# Altium PCB Electrode-Front-End.PcbDoc
Units mil, origin at the board's own origin, x right, y up, seen from the top; angles counter-clockwise.
Board outline 1675 x 1075 mil, 4 copper layers (Top Layer, GND, POWER, Bottom Layer), stack 23.756 mil thick; 76 components, 48 nets, 223 pads, 208 vias.
Unrouted connection lines stored in the file: 52.
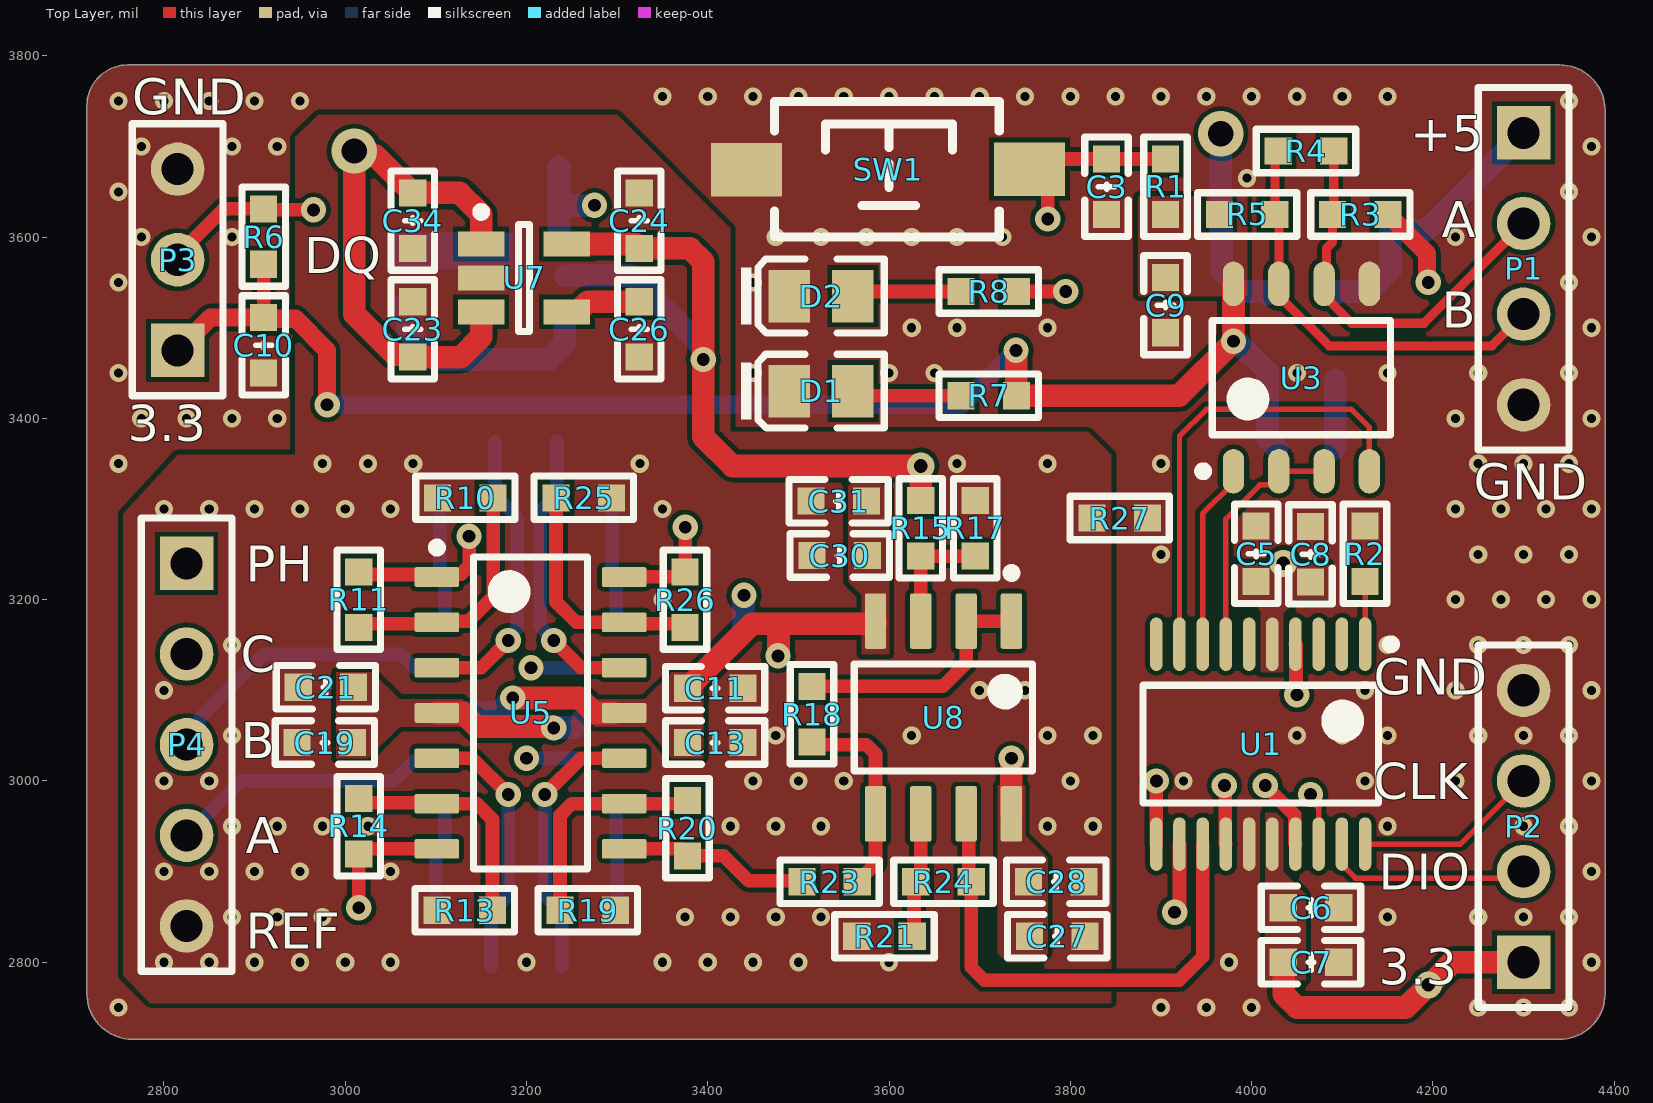
[diagram p0: Top Layer view]
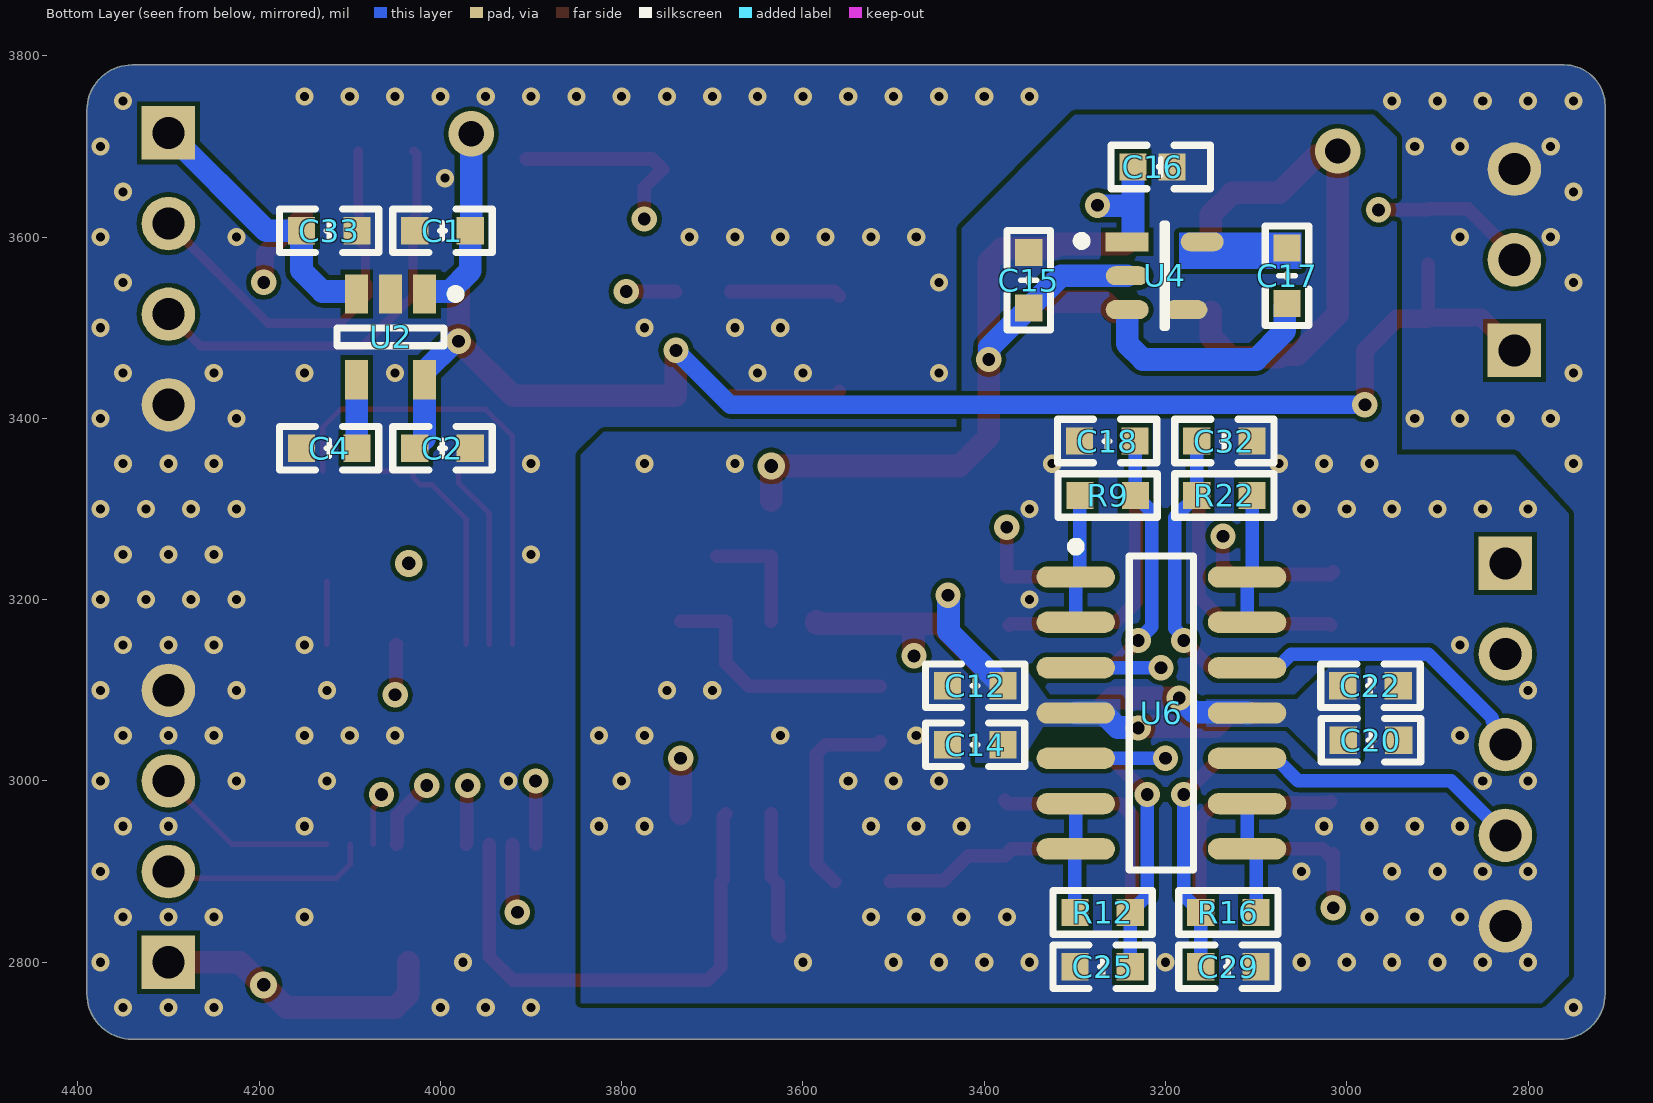
[diagram p1: Bottom Layer view, seen from below]
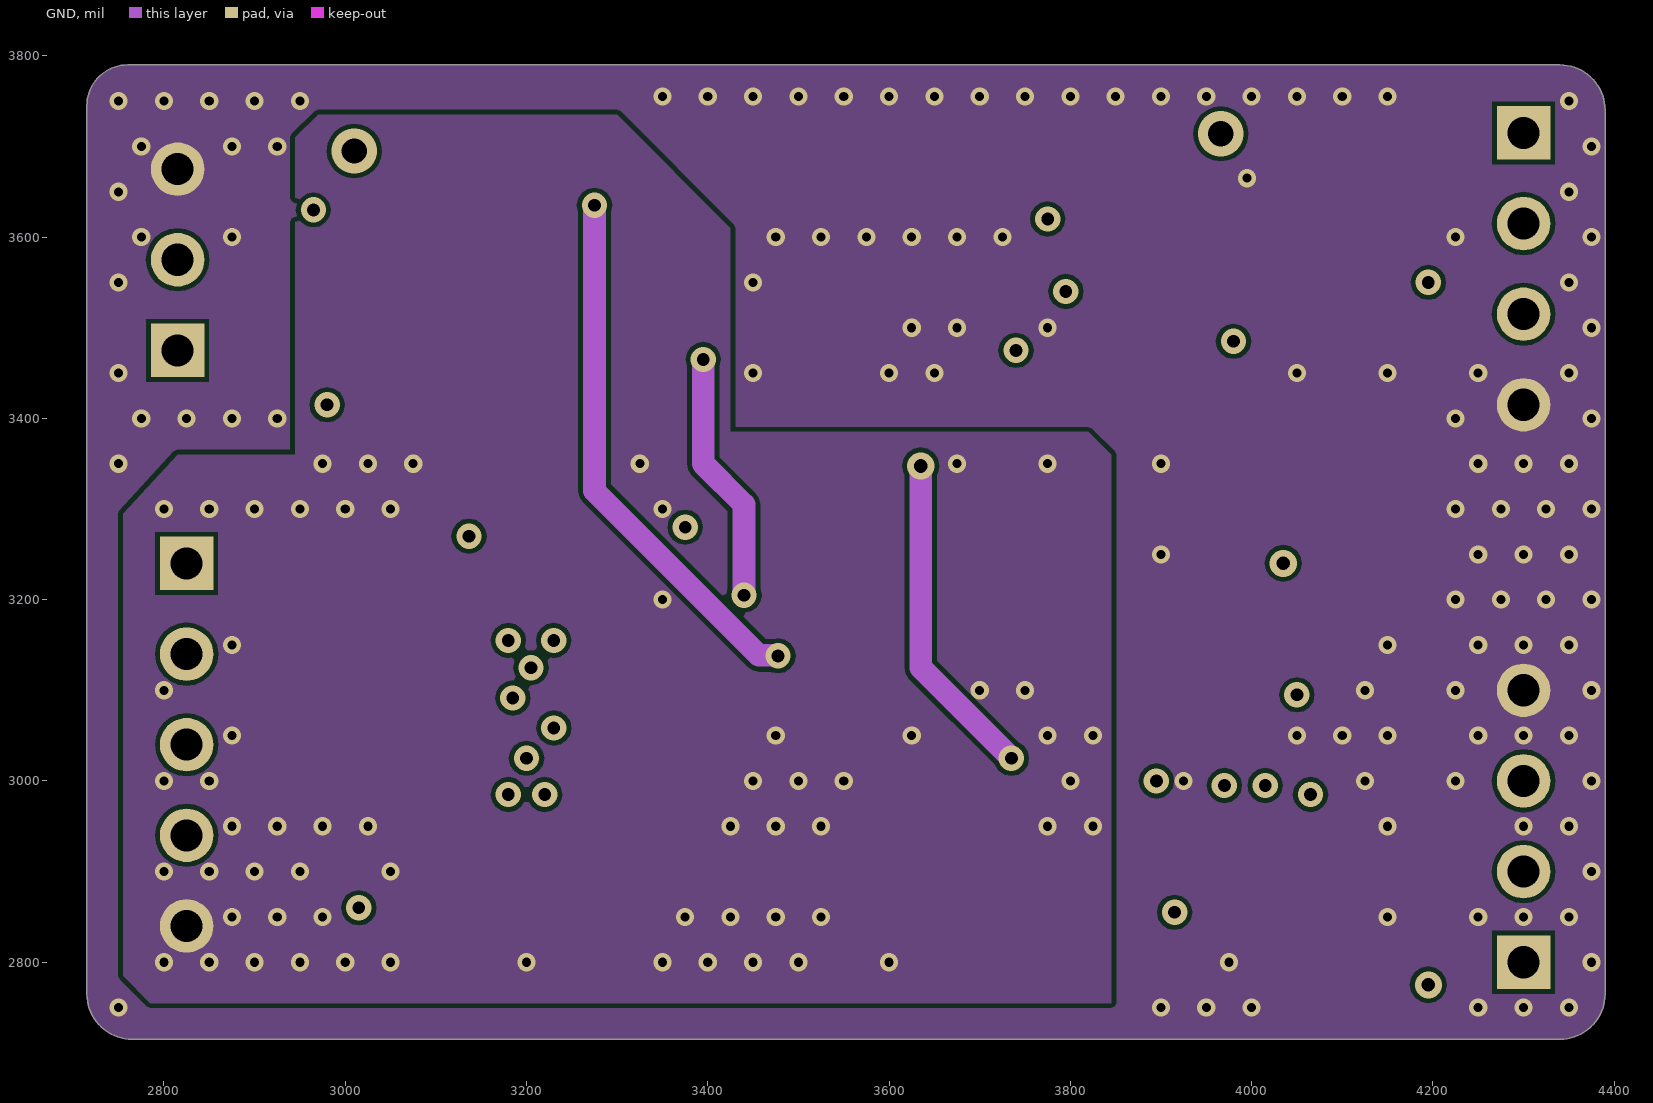
[diagram p2: GND]
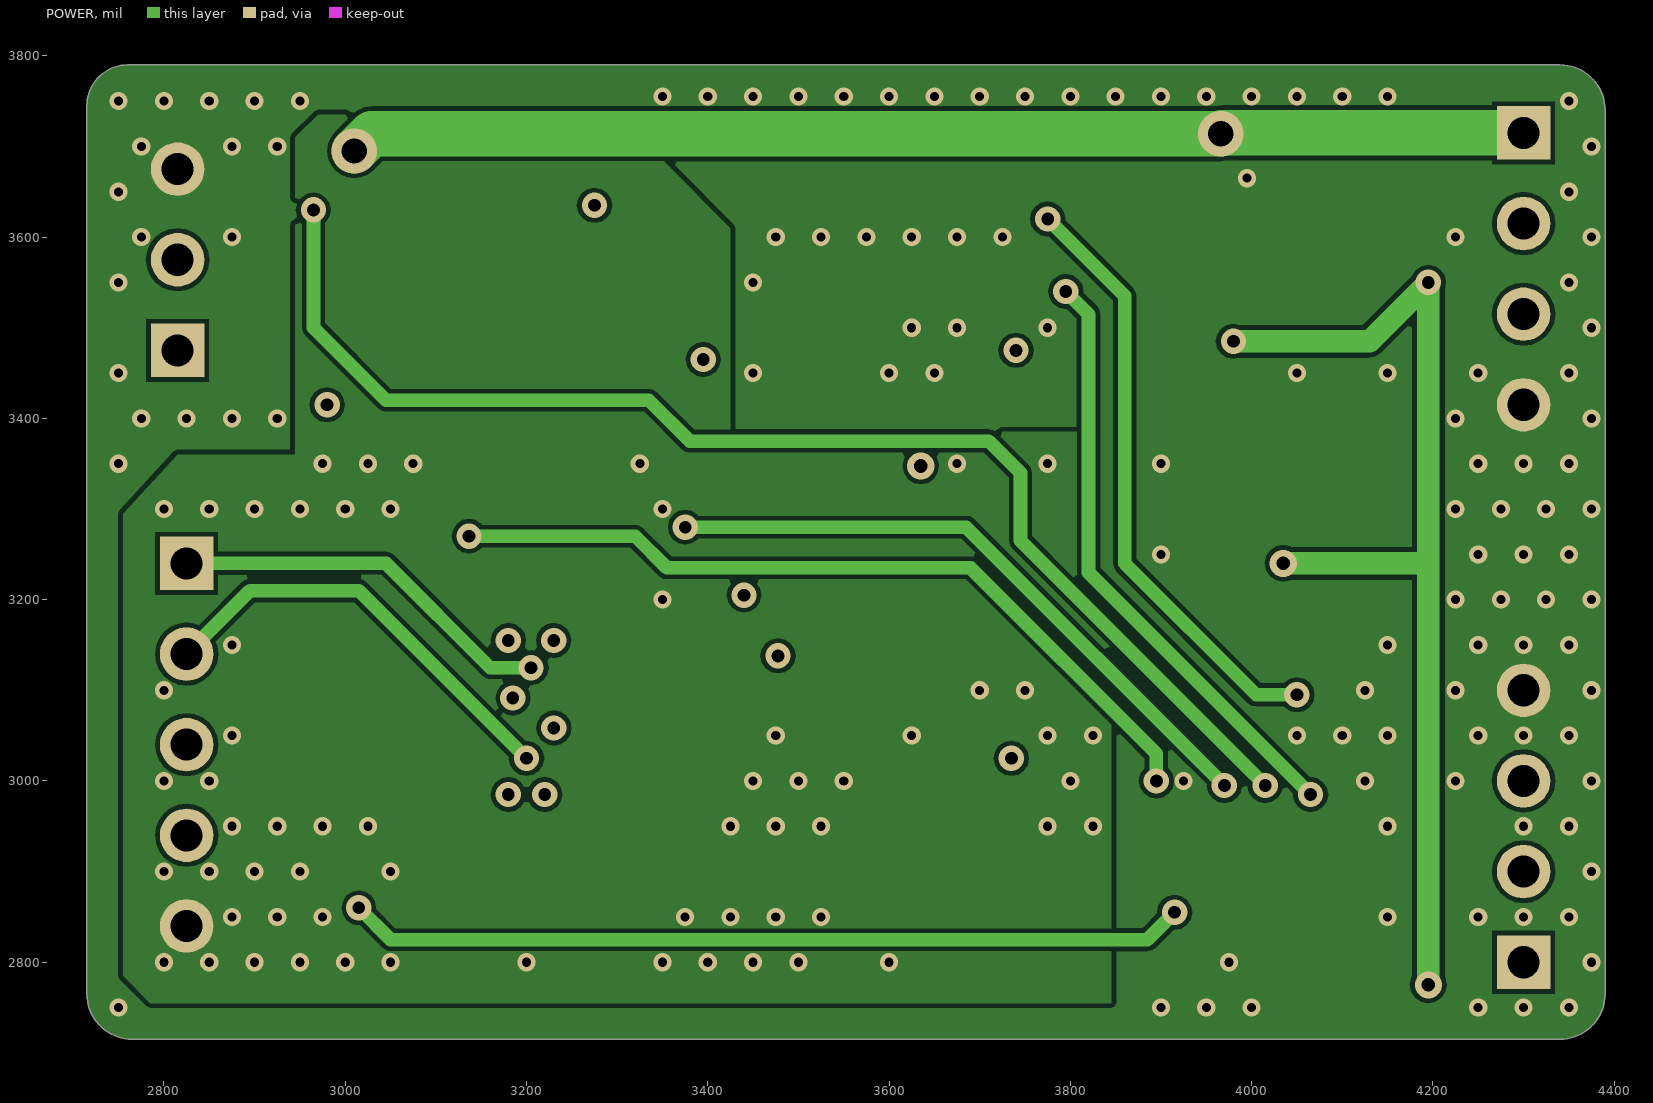
[diagram p3: POWER]
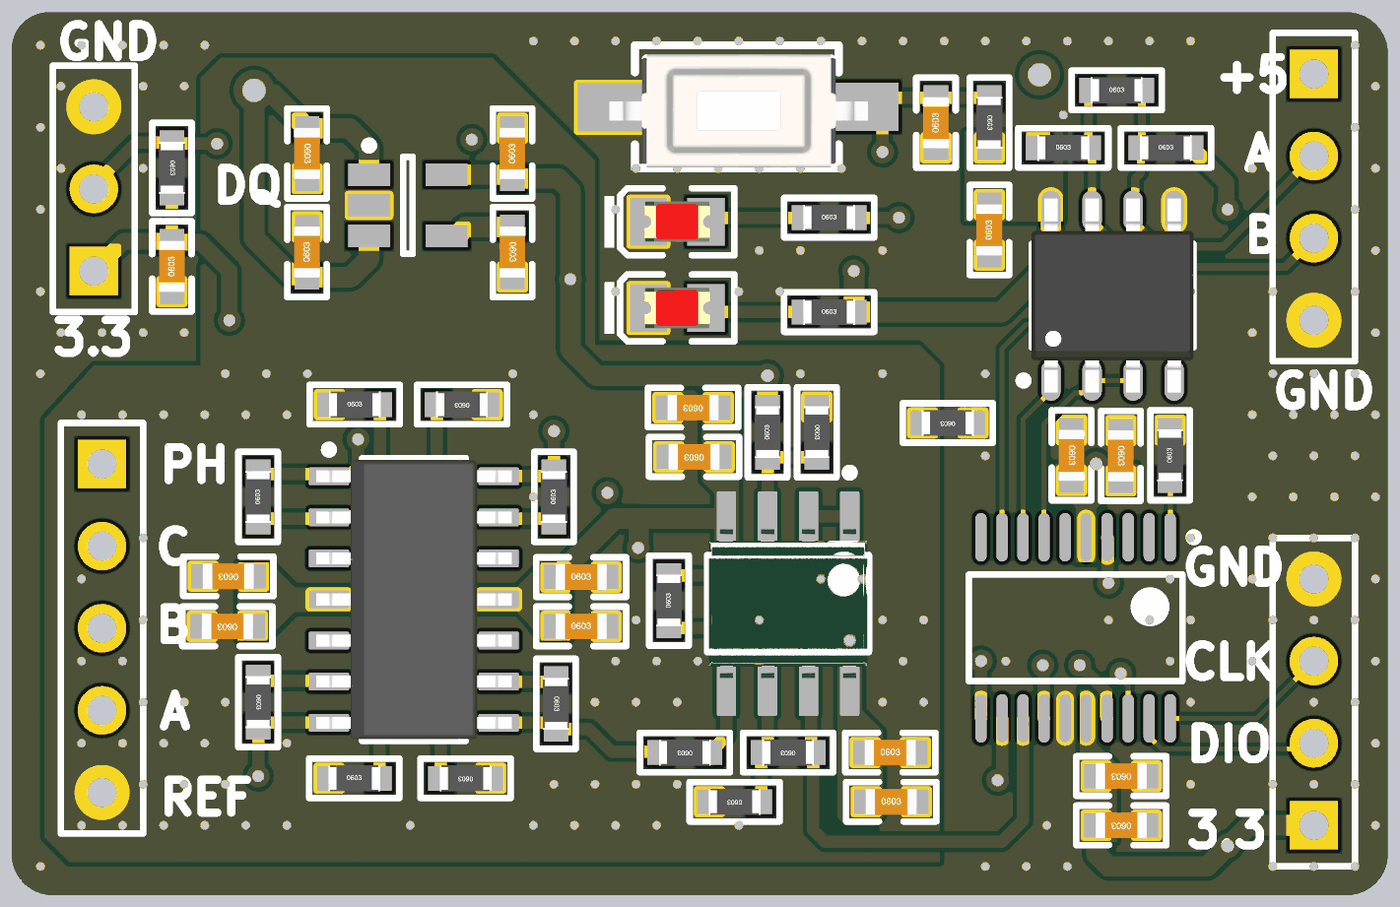
[diagram p4: 3D render of the assembled board from above, using the file's embedded part models]
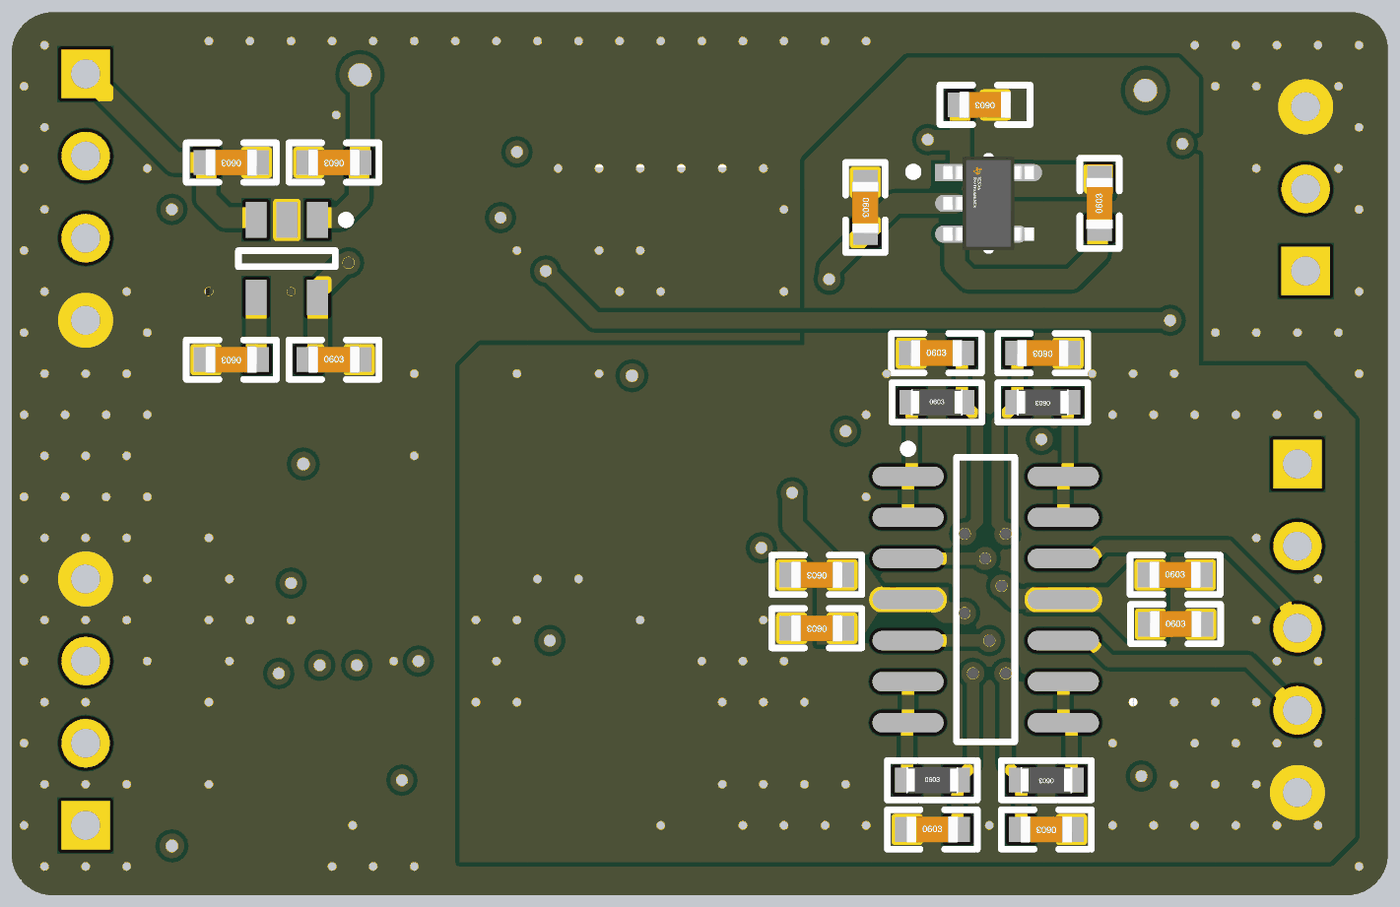
[diagram p5: 3D render of the assembled board from below, using the file's embedded part models]

## Layer stack, top to bottom
Top Solder: solder mask 0.4, Solder Resist, Dk 3.5
Top Layer: signal copper 1.4
Dielectric 2: prepreg 2.8, PP-006, Dk 4.1
GND: signal copper 1.378
Dielectric 1: dielectric 12.6, FR-4, Dk 4.8
POWER: signal copper 1.378
Dielectric 3: prepreg 2.8, PP-006, Dk 4.1
Bottom Layer: signal copper 1.4
Bottom Solder: solder mask 0.4, Solder Resist, Dk 3.5

## Board outline
2715,2765 2715,3745 cw(c2760,3745) 2760,3790 4340,3790 cw(c4340,3740) 4390,3740 4390,2765 cw(c4340,2765) 4340,2715 2765,2715 cw(c2765,2765)

## Design rules (kind name [scope] priority, off if disabled: settings)
Clearance [All] p1: gap=5 ignorepadtopadclearanceinfootprint=FALSE except(0: Arc-Hole Track-Hole SMDPad-Hole THPad-Hole Via-Hole Fill-Hole Poly-Hole Region-Hole Text-Hole)
ComponentClearance [All] p1: gap=0 collisioncheckmode=3 verticalgap=0 showdistances=FALSE
MinimumSolderMaskSliver [All] p1: minsoldermaskwidth=0
PlaneConnect [All] p1: planeconnectstyle=Direct reliefexpansion=20 reliefentries=4 reliefconductorwidth=10 reliefairgap=10
PolygonConnect [All] p1: connectstyle=Direct reliefconductorwidth=10 reliefentries=4 polygonreliefangle="90 Angle" airgapwidth=10
RoutingVias [All] p1: holewidth=28 width=50 viastyle="Through Hole" minholewidth=12 minwidth=24 maxholewidth=28 maxwidth=50
SilkToSilkClearance [All] p1: silktosilkclearance=0
SilkToSolderMaskClearance [IsPad] p1: minsilkscreentomaskgap=0 clearancetoexposedcopper=TRUE
SolderMaskExpansion [All] p1: expansion=4
Width Default [All] p1: maxlimit=50 minlimit=6 preferedwidth=10 minimp=50.000000 maximp=50.000000 favimp=50.000000
Width POWER [InNetClass('POWER')] p2: maxlimit=50 minlimit=20 preferedwidth=25
25 further rules are at their usual default settings.

## Classes and differential pairs
component class Sheet3: C11 C12 C13 C14 C15 C16 C17 C18 C19 C20 C21 C22 C23 C24 C25 C26 C27 C28 C29 C30 C31 C32 C34 R9 R10 R11 R12 R13 R14 R15 R16 R17 R18 R19 R20 R21 R22 R23 R24 R25 R26 U4 U5 U6 U7 U8
component class Sheet2: C1 C2 C3 C4 C5 C6 C7 C8 C9 C10 C33 D1 D2 P1 P2 P3 P4 R1 R2 R3 R4 R5 R6 R7 R8 R27 SW1 U1 U2 U3

## Components (designator, comment, footprint, x,y, rotation, side; value= is the part's Value field where it differs from the comment)
C1 "1uF" "C 0603_L"#1 3997.72,3607.1 r0 bottom
C2 "4.7uF" "C 0603_L"#1 3997.72,3367.1 r180 bottom
C3 "104" "C 0603_L"#1 3840,3655.59 r90 top
C4 "0.01uF" "C 0603_L"#1 4122.72,3367.1 r0 bottom
C5 "104" "C 0603_L"#1 4005,3250.59 r270 top
C6 "104" "C 0603_L"#1 4065.59,2860 r180 top
C7 "104" "C 0603_L"#1 4065.59,2800 r180 top
C8 "104" "C 0603_L"#1 4065,3250 r270 top
C9 "104" "C 0603_L"#1 3905,3525 r90 top
C10 "104" "C 0603_L"#1 2910,3480.59 r90 top
C11 "10uF" "C 0603_L"#1 3408.13,3102.32 r0 top
C12 "10uF" "C 0603_L"#1 3410,3105 r0 bottom
C13 "0.1uF" "C 0603_L"#1 3408.13,3042.32 r0 top
C14 "0.1uF" "C 0603_L"#1 3410,3040 r0 bottom
C15 "104" "C 0603_L"#1 3350.89,3552.4 r270 bottom
C16 "104" "C 0603_L"#2 3205.3,3677.4 r0 bottom
C17 "104" "C 0603_L"#1 3065.89,3557.4 r90 bottom
C18 "0.1uF" "C 0603_L"#1 3264.41,3375 r180 bottom
C19 "10uF" "C 0603_L"#1 2977.54,3042.32 r180 top
C20 "10uF" "C 0603_L"#1 2973.31,3045 r180 bottom
C21 "0.1uF" "C 0603_L"#1 2978.71,3103.32 r180 top
C22 "0.1uF" "C 0603_L"#1 2973.9,3105 r180 bottom
C23 "1uF" "C 0603_L"#1 3074.49,3498.19 r90 top
C24 "4.7uF" "C 0603_L"#1 3324.49,3618.19 r90 top
C25 "0.1uF" "C 0603_L"#1 3269.41,2795 r180 bottom
C26 "0.01uF" "C 0603_L"#1 3324.49,3498.19 r270 top
C27 "10uF" "C 0603_L"#1 3785.59,2828.7 r0 top
C28 "0.1uF" "C 0603_L"#1 3784.41,2888.7 r0 top
C29 "0.1uF" "C 0603_L"#1 3130.59,2795 r0 bottom
C30 "10uF" "C 0603_L"#1 3545.59,3248.7 r180 top
C31 "0.1uF" "C 0603_L"#1 3544.41,3308.7 r180 top
C32 "0.1uF" "C 0603_L"#1 3135,3375 r0 bottom
C33 "1uF" "C 0603_L"#1 4122.72,3607.1 r0 bottom
C34 "1uF" "C 0603_L"#1 3074.49,3618.19 r270 top
D1 "蓝灯 0805" 0805_LED_S1 3525.04,3430 r0 top
D2 "蓝灯 0805" 0805_LED_S1 3525.04,3535 r0 top
P1 "Header 4" HDR1X4 4300,3715 r270 top
P2 "Header 4" HDR1X4 4300,2800 r90 top
P3 "Header 3" HDR1X3 2815,3475 r90 top
P4 "Header 5" HDR1X5 2825,3240 r270 top
R1 "1K" "R 0603_L" 3905,3655.59 r270 top
R2 "1K" "R 0603_L" 4125,3250.59 r90 top
R3 "360" "R 0603_L" 4120,3625 r0 top
R4 "120" "R 0603_L" 4060,3695 r0 top
R5 "360" "R 0603_L" 3995,3625 r0 top
R6 "1K" "R 0603_L" 2910,3600.59 r270 top
R7 "360" "R 0603_L" 3710,3425 r0 top
R8 "360" "R 0603_L" 3710,3540 r0 top
R9 "100Ω" "R 0603_L" 3263.82,3315 r180 bottom
R10 "100Ω" "R 0603_L" 3132.54,3312.32 r0 top
R11 "100Ω" "R 0603_L" 3015,3200 r90 top
R12 "10KΩ" "R 0603_L" 3269.41,2855 r180 bottom
R13 "100Ω" "R 0603_L" 3131.94,2857.32 r0 top
R14 "100Ω" "R 0603_L" 3015,2950 r270 top
R15 "100Ω" "R 0603_L" 3635,3278.7 r90 top
R16 "10KΩ" "R 0603_L" 3130.59,2855 r0 bottom
R17 "100Ω" "R 0603_L" 3695,3278.7 r270 top
R18 "100Ω" "R 0603_L" 3515,3073.7 r90 top
R19 "100Ω" "R 0603_L" 3267.54,2857.32 r180 top
R20 "100Ω" "R 0603_L" 3377.54,2947.91 r270 top
R21 "100Ω" "R 0603_L" 3595,2828.7 r180 top
R22 "10KΩ" "R 0603_L" 3135,3315 r0 bottom
R23 "100Ω" "R 0603_L" 3534.41,2888.7 r180 top
R24 "100Ω" "R 0603_L" 3660,2888.7 r180 top
R25 "100Ω" "R 0603_L" 3263.13,3312.32 r180 top
R26 "100Ω" "R 0603_L" 3375,3200 r90 top
R27 "0" "R 0603_L" 3854.41,3290 r180 top
SW1 "3x6x5" "TSW SMD-3*6*2.5" 3600,3675 r0 top
U1 "STM32F030F4P6" STM-TSSOP20_L 4010,3040.59 r270 top
U2 "LP2992AIM5X-3.3" MF05A_N 4055,3490 r270 bottom
U3 "ST3485EBDR" STM-SO-8_C_L 4055,3445 r90 top locked
U4 "TPS60400DBVT" FP-DBV0005A-IPC_C 3200.89,3557.4 r180 bottom
U5 "TLC2274AIDR" D0014A_L 3204.49,3075 r0 top
U6 "AD8609ARZ-REEL7" ADI-R-14_N 3204.49,3075 r180 bottom
U7 "LP2992AIM5X-2.5" MF05A_M 3197.24,3555 r0 top
U8 "LMV358IDR" FP-D0008A-MFG 3660,3070 r270 top

## Footprints (in the part's own frame and the unit in brackets; to place one, negate y for a bottom-side part, rotate by r counter-clockwise, add the part's x,y. Pads: shape width x height; smd on the part's side, far side on the other; paste and mask are expansions set on the pad)
0805_LED_S1 [mm]
  rect 1.16x1.47 smd: A(0.89,0) K(-0.89,0)
  silkscreen extent -2.24,-1.04 1.77,1.03, body extent -1.01,-0.62 1.01,0.62, height 1.1
ADI-R-14_N [mm] "SOIC, 14-Leads, Body 8.65x3.9mm, Pitch 1.27mm, IPC Medium Density"
  oval 2.2x0.6 smd: 1(-2.4,3.81) 2(-2.4,2.54) 3(-2.4,1.27) 4(-2.4,0) 5(-2.4,-1.27) 6(-2.4,-2.54) 7(-2.4,-3.81) 8(2.4,-3.81) 9(2.4,-2.54) 10(2.4,-1.27) 11(2.4,0) 12(2.4,1.27) 13(2.4,2.54) 14(2.4,3.81)
  silkscreen extent -2.53,-4.4 0.9,4.78, body extent -2,-4.4 2,4.4, height 1.75
"C 0603_L"#1 [mil] "无极性贴片电容"
  rect 30x30 smd: 1(-30.59,0) 2(30.59,0)
  silkscreen extent -55,-24 55,24, body extent -31,-16 31,16, height 32
"C 0603_L"#2 [mil] "无极性贴片电容"
  rect 30x30 smd: 1(-12.59,0) 2(30.59,0)
  silkscreen extent -55,-24 55,24, body extent -31,-16 31,16, height 32
D0014A_L [mm] "SOIC, 14-Leads, Body 8.75x4mm, Pitch 1.27mm, IPC High Density"
  rrect18% 1.25x0.55 smd: 1(-2.625,3.81) 2(-2.625,2.54) 3(-2.625,1.27) 4(-2.625,0) 5(-2.625,-1.27) 6(-2.625,-2.54) 7(-2.625,-3.81) 8(2.625,-3.81) 9(2.625,-2.54) 10(2.625,-1.27) 11(2.625,0) 12(2.625,1.27) 13(2.625,2.54) 14(2.625,3.81)
  silkscreen extent -2.75,-4.38 1.6,4.76, body extent -3.02,-4.32 3.02,4.32, height 1.59
FP-D0008A-MFG [mm]
  rrect17% 1.55x0.6 smd paste+0 mask+0: 1(-2.7,1.905) 2(-2.7,0.635) 3(-2.7,-0.635) 4(-2.7,-1.905) 5(2.7,-1.905) 6(2.7,-0.635) 7(2.7,0.635) 8(2.7,1.905)
  silkscreen extent -4.17,-2.5 1.5,2.5, body extent -3.57,-2.75 3.57,2.75, height 0.25
FP-DBV0005A-IPC_C [mm]
  rect 1.205x0.532 smd paste+0 mask+0: 1(-1.05,0.95)
  rrect100% 1.205x0.532 smd paste+0 mask+0: 2(-1.05,0) 3(-1.05,-0.95) 4(0.593,-0.95) 5(1.05,0.95)
  silkscreen extent -2.45,-1.45 0.05,1.45, body extent -1.4,-1.45 1.4,1.45, height 1.45
HDR1X3 [mm] "Connector; Header; 3 Position"
  rect 1.5x1.5 hole 0.9: 1(0,0)
  round 1.5 hole 0.9: 2(2.54,0) 3(5.08,0)
  silkscreen extent -1.27,-1.27 6.35,1.27
HDR1X4 [mm] "Connector; Header; 4 Position"
  rect 1.5x1.5 hole 0.9: 1(0,0)
  round 1.5 hole 0.9: 2(2.54,0) 3(5.08,0) 4(7.62,0)
  silkscreen extent -1.27,-1.27 8.89,1.27
HDR1X5 [mm] "Connector; Header; 5 Position"
  rect 1.5x1.5 hole 0.9: 1(0,0)
  round 1.5 hole 0.9: 2(2.54,0) 3(5.08,0) 4(7.62,0) 5(10.16,0)
  silkscreen extent -1.27,-1.27 11.43,1.27
MF05A_M [mm] "SOT23, 5-Leads, Body 2.9x1.6mm, Pitch 0.95mm, Lead Span 2.8mm, IPC Low Density"
  rect 1.3x0.7 smd: 1(-1.2,0.95) 2(-1.2,0) 3(-1.2,-0.95) 4(1.2,-0.95) 5(1.2,0.95)
  silkscreen extent -1.32,-1.5 0.15,1.97, body extent -0.83,-1.49 0.83,1.5, height 1.19
MF05A_N [mm] "SOT23, 5-Leads, Body 2.9x1.6mm, Pitch 0.95mm, Lead Span 2.8mm, IPC Medium Density"
  rect 1.1x0.65 smd: 1(-1.2,0.95) 2(-1.2,0) 3(-1.2,-0.95) 4(1.2,-0.95) 5(1.2,0.95)
  silkscreen extent -1.32,-1.5 0.25,1.95, body extent -0.83,-1.49 0.83,1.5, height 1.19
"R 0603_L" [mil] "1/10W贴片电阻"
  rect 30x30 smd: 1(-30.59,0) 2(30.59,0)
  silkscreen extent -55,-24 55,24, body extent -31,-16 32,16, height 16
STM-SO-8_C_L [mm] "SOIC, 8-Leads, Body 5x4mm, Pitch 1.27mm, IPC High Density"
  oval 1.25x0.6 smd: 1(-2.625,1.905) 2(-2.625,0.635) 3(-2.625,-0.635) 4(-2.625,-1.905) 5(2.625,-1.905) 6(2.625,-0.635) 7(2.625,0.635) 8(2.625,1.905)
  silkscreen extent -2.75,-2.5 1.6,2.88, body extent -3,-2.5 3,2.5, height 1.75
STM-TSSOP20_L [mm] "SOP, 20-Leads, Body 6.6x4.5mm, Pitch 0.65mm, IPC High Density"
  oval 1.5x0.35 smd: 1(-2.8,2.925) 2(-2.8,2.275) 3(-2.8,1.625) 4(-2.8,0.975) 5(-2.8,0.325) 6(-2.8,-0.325) 7(-2.8,-0.975) 8(-2.8,-1.625) 9(-2.8,-2.275) 10(-2.8,-2.925) 11(2.8,-2.925) 12(2.8,-2.275) 13(2.8,-1.625) 14(2.8,-0.975) 15(2.8,-0.325) 16(2.8,0.325) 17(2.8,0.975) 18(2.8,1.625) 19(2.8,2.275) 20(2.8,2.925)
  silkscreen extent -2.92,-3.3 1.65,3.78, body extent -2.25,-3.3 2.25,3.3, height 1.2
"TSW SMD-3*6*2.5" [mm] "3*6*2.5mm"
  rect 2x1.5 smd: 1(-3.996,-0.02) 2(3.937,0)
  silkscreen extent -3.21,-1.9 3.09,1.9, body extent -4,-1.88 4,1.62, height 2.59

## Part data
C1 C2 C3 C4 C5 C6 C7 C8 C9 C10 C15 C16 C17 C23 C24 C26 C33 C34: library part C, "无极性贴片电容"
C11 C12 C19 C20 C27 C30: library part "0603 10uF (106) 10% 10V", "贴片电容", Package=0603, SuppliersPartNumber=C19702, ComponentLink1Description=供应商链接, ComponentLink1URL=http://www.szlcsc.com/product/details_20411.html, Supplier=LC
C13 C14 C18 C21 C22 C25 C28 C29 C31 C32: library part "0603 100nF (104) 10% 50V", "贴片电容", Package=0603, SuppliersPartNumber=C14663, ComponentLink1Description=供应商链接, ComponentLink1URL=http://www.szlcsc.com/product/details_15331.html, Supplier=LC
D1 D2: library part "0805 蓝灯", "发光二极管", Package=0805, SuppliersPartNumber=C2293, ComponentLink1Description=供应商链接, ComponentLink1URL=http://www.szlcsc.com/product/details_2666.html, Supplier=LC
P1 P2: "Header, 4-Pin", LatestRevisionDate=17-Jul-2002, LatestRevisionNote="Re-released for DXP Platform.", Publisher="Altium Limited"
P3: "Header, 3-Pin", LatestRevisionDate=17-Jul-2002, LatestRevisionNote="Re-released for DXP Platform.", Publisher="Altium Limited"
P4: "Header, 5-Pin", LatestRevisionDate=17-Jul-2002, LatestRevisionNote="Re-released for DXP Platform.", Publisher="Altium Limited"
R1 R2 R3 R4 R5 R6 R7 R8 R27: library part R, "贴片电阻"
R9 R10 R11 R12 R13 R14 R15 R16 R17 R18 R19 R20 R21 R22 R23 R24 R25 R26: library part "0603 100Ω (1000) 1%", "贴片电阻", Package=0603, SuppliersPartNumber=C22775, ComponentLink1Description=供应商链接, ComponentLink1URL=http://www.szlcsc.com/product/details_23502.html, Supplier=LC
SW1: library part "TSW 3x6", "3x6轻触开关", BOM名称=3x6轻触开关
U1: library part CMP-0304-00039-2, "ARM Cortex-M0 32-bit MCU, 16 KB Flash, 4 KB Internal RAM, 15 I/Os, 20-pin TSSOP, -40 to 85 degC, Tube", I/Os (High Current)=15, Operating Frequency(F) (Processor speed) (MHz)=48, Supply Voltage(Vcc) min (V)=2.4, ComponentLink1Description="Manufacturer URL", ComponentLink1URL=http://www.st.com/web/en/home.html, ComponentLink2Description=Datasheet, ComponentLink2URL=http://www.st.com/st-web-ui/static/active/en/resource/technical/document/datasheet/DM00088500.pdf, ComponentLink3Description="Package Specification", ComponentLink3URL=http://www.st.com/st-web-ui/static/active/en/resource/technical/document/datasheet/DM00065136.pdf, Core="ARM Cortex-M0", DatasheetVersion="Rev. 1", FLASH Size (Prog) (kB)=16, Internal RAM Size (kB)=4, Mounting Technology="Surface Mount", PackageDescription="20-Pin Thin Shrink Small Outline Package, 6.5 x 4.4 mm Body, 0.65 mm Pitch", PackageReference=TSSOP20, PackageVersion="Rev. 1, 11/2012", Packing=Tube, PartNumber=STM32F030F4P6
U2: library part CMP-0062-02134-2, "Micropower 250 mA Low-Noise Ultra Low-Dropout Regulator, 5-pin SOT-23", Manufacturer="National Semiconductor", PackageTopMarking=LFEA*XTT, PowerWise=N, ComponentLink1Description="LP2992 Datasheet", ComponentLink1URL=http://www.national.com/ds/LP/LP2992.pdf, ComponentLink2Description="LP2992 Web Page", ComponentLink2URL=http://www.national.com/pf/LP/LP2992.html, ComponentLink3Description="MF05A Package Page", ComponentLink3URL=http://www.national.com/packaging/folders/mf05a.html, CompType="LDO IC", DatasheetVersion=May-2005, PackageDescription="Molded SOT-23, .115 x .063 x .040 in Body, 5 Lead, .0375 in Pitch", PackageReference=MF05A, PackageVersion="revD, Aug-2008", PinCount=5, RevisionNote="Component URLs added", RoHS=N
U3: library part CMP-2000-07158-1, "15 KV ESD Protected, Up to 12 Mbps RS-485/RS-422 Transceiver, 3.3 V, -40 to 85 degC, 8-Pin SOIC (SO-8), RoHS, Tape and Reel", Dual Supply Voltage (Max)=NotRequiredV, Manufacturer=STMicroelectronics, Operating Temp Range=-40Cto85C, Operating Temperature Classification=Industrial, Package Description="8-Pin Small Outline Integrated Circuit, Body 4.9 x 3.9 mm, Pitch 1.27 mm", Package Reference=SO-8, Package Type=SOICN, Power Supply Requirement=Single, Single Supply Voltage (Max)=3.6V, Single Supply Voltage (Min)=3V, Single Supply Voltage (Typ)=3.3V, Supply Current=2.2mA, Data Rate=15kbps, Data Transmission Topology=Multidrop/Multipoint, Datasheet URL=http://www.produktinfo.conrad.com/datenblaetter/1100000-1199999/001185042-da-01-en-IC_TXRX_3_3V_RS485_ST3485EBDR_SOIC_8_STM.pdf, Datasheet Version="Rev. 6 , 12/2013", DELETED=Compliant, Dual Supply Voltage (Min)=NotRequiredV, Dual Supply Voltage (Typ)=NotRequiredV, Interface Circuit Standard 1=RS-422/RS-485, Manufacturer URL=http://www.st.com/, Mounting=SurfaceMount, Mounting Technology=SurfaceMount, Number of Receivers=1, Number of Transceivers=1, Number of Transmitters=1, Packaging=TapeandReel, Pin Count=8, Rad Hardened=No, Receiver Signal Type=Differential, Transmitter Signal Type=Differential
U4: library part CMP-0391-00017-3, "IC REG CHARG PUMP INV 60MA SOT23", Case/Package=SOT-23, Current Rating=60A, Frequency=250kHz, Max Input Voltage=5.25V, Max Operating Temperature=85°C, Max Output Current=60mA, Max Output Voltage=-5.25V, Min Input Voltage=1.8V, Min Operating Temperature=-40°C, Min Output Voltage=-1.6V, Operating Supply Current=125uA, Output Power=437mW, Package Quantity=1, Contact Plating=Gold, Height=1.15mm, Lead Free="Lead Free", Length=2.9mm, Logic Function=Inverting, Max Supply Voltage=5.25V, Min Supply Voltage=1.8V, Number of Outputs=1, Number of Pins=5, Output Current=60mA, Output Type=Adjustable, Output Voltage=-5.25V, Packaging="Tape and Reel", Quiescent Current=125uA, Radiation Hardening=No, REACH SVHC="No SVHC", Switching Frequency=250kHz, Synchronous Rectifier=No, Termination=SMD/SMT, Weight=0.000459oz, Width=1.6mm
U5: library part CMP-0272-01921-3, "Advanced LinCMOS(TM) Rail-to-Rail Quad Operational Amplifier, 4.4 to 16 V, -40 to 125 degC, 14-pin SOIC (D14), Green (RoHS & no Sb/Br)", Manufacturer="Texas Instruments", Rating=Catalog, Total Supply Voltage(Max)(+5V is 5, +/-5V is 10)=16, Total Supply Voltage(Min)(+5V is 5, +/-5V is 10)=4.4, CMRR(Min)(dB)=70, Code_JEDEC=MS-012, ComponentLink1Description="Manufacturer URL", ComponentLink1URL=http://www.ti.com/, ComponentLink2Description=Datasheet, ComponentLink2URL=http://www.ti.com/lit/ds/symlink/tlc2274a.pdf, ComponentLink3Description="Package Specification", ComponentLink3URL=http://www.ti.com/lit/ml/mpds177g/mpds177g.pdf, DatasheetVersion=SLOS190G, Eco-Plan="Green (RoHS & no Sb/Br)", GBW(Typ)(MHz)=2.18, IIB(Max)(pA)=60, Iq per channel(Max)(mA)=1.5, Mounting Technology="Surface Mount", Number of Channels=4, Offset Drift(Typ)(uV/C)=2, PackageDescription="14-Pin Plastic Small Outline, Body 8.65 x 3.9 mm, Pitch 1.27 mm", PackageReference=D0014A, PackageVersion="4040047-5/M, 06/2011", Packing="LARGE T&R", PartNumber=TLC2274AIDR, Slew Rate(Typ)(V/us)=3.6, Sub Family="Low Noise Amp (<=10nV/rtHz), Precision Amplifier", Vio (25C)(Max)(mV)=0.95
U6: library part CMP-0384-00468-2, "Quad Channel Single-Supply Operation Operational Amplifier, 400 KHz BW, 100 mV/us SR, Industrial, 14-pin SOIC (R-14), Reel", Amplifiers Per Package=4, Generic Part Number=AD8609, Input Bias Current=200fA, Input Offset Voltage=12uV, Manufacturer="Analog Devices", Code_JEDEC=MS-012-AB, ComponentLink1Description="Manufacturer URL", ComponentLink1URL=http://www.analog.com/en/index.html, ComponentLink2Description=Datasheet, ComponentLink2URL=http://www.analog.com/static/imported-files/data_sheets/AD8603_8607_8609.pdf, ComponentLink3Description="Package Specification", ComponentLink3URL=http://www.analog.com/static/imported-files/packages/PKG_PDF/SOIC_Narrow%20(R)/R_14.pdf, ComponentLink4Description="Reference Circuit", ComponentLink4URL=http://www.analog.com/en/all-operational-amplifiers-op-amps/operational-amplifiers-op-amps/ad8609/products/product.html#product-recommendations, DatasheetVersion="Rev. C", Iq/Amp=40uA, Mounting Technology="Surface Mount", PackageDescription="14-Pin Standard Small Outline Package, Body 8.65 x 3.9 mm, Pitch 1.27 mm", PackageReference=R-14, PackageVersion=060606-A, PartNumber=AD8609ARZ-REEL7, RevisionNote="Reference Circuit URL fixed", Slew Rate=100mV/us, Small Signal Bandwidth=400KHz, V Span Max=5V, V Span Min=1.8V
U7: library part CMP-0062-02121-2, "Micropower 250 mA Low-Noise Ultra Low-Dropout Regulator, 5-pin SOT-23", Manufacturer="National Semiconductor", PackageTopMarking=LFDA*XTT, PowerWise=N, ComponentLink1Description="LP2992 Datasheet", ComponentLink1URL=http://www.national.com/ds/LP/LP2992.pdf, ComponentLink2Description="LP2992 Web Page", ComponentLink2URL=http://www.national.com/pf/LP/LP2992.html, ComponentLink3Description="MF05A Package Page", ComponentLink3URL=http://www.national.com/packaging/folders/mf05a.html, CompType="LDO IC", DatasheetVersion=May-2005, PackageDescription="Molded SOT-23, .115 x .063 x .040 in Body, 5 Lead, .0375 in Pitch", PackageReference=MF05A, PackageVersion="revD, Aug-2008", PinCount=5, RevisionNote="Component URLs added", RoHS=N
U8: library part CMP-04895-000136-1, "IC OPAMP GP 2 CIRCUIT 8SOIC", Case/Package=SOIC, Input Bias Current=250nA, Input Offset Voltage (Vos)=7mV, Max Operating Temperature=125°C, Max Supply Voltage=5.5V, Min Operating Temperature=-40°C, Min Supply Voltage=2.7V, Nominal Supply Current=440uA, Operating Supply Current=210uA, Output Current=160mA, Package Quantity=2500, Power Supply Rejection Ratio (PSRR)=50dB, Voltage Gain=100dB, Bandwidth=1MHz, Common Mode Rejection Ratio=50dB, Contact Plating=Gold, Gain Bandwidth Product=1MHz, Height=1.58mm, Lead Free="Lead Free", Length=4.9mm, Mount="Surface Mount", Number of Amplifiers=2, Number of Channels=2, Number of Circuits=2, Number of Elements=2, Number of Pins=8, Output Current per Channel=160mA, Packaging="Tape and Reel", Radiation Hardening=No, REACH SVHC="No SVHC", RoHS Compliant=Yes, Slew Rate=1V/μs, Unity Gain Bandwidth Product=1MHz, Width=3.91mm

## Via types
v1: diameter 20, hole 10, Top Layer to Bottom Layer, tented both sides, 174 vias
v2: diameter 28, hole 14, Top Layer to Bottom Layer, tented both sides, 29 vias
v3: diameter 30, hole 15, Top Layer to Bottom Layer, tented both sides, 3 vias
v4: diameter 50, hole 28, Top Layer to Bottom Layer, tented both sides, 2 vias

## Nets (pads, with @x,y where several pads share a name; then routed paths per layer and width w, separated by ;. In a path a pad name is that pad's centre, name@x,y a point inside that pad or via, vN(x,y) a via of type N, cw(c..) or ccw(c..) an arc to the next point about the centre after c; other vN are vias at no path point)
+2.5-A: C12.1 C14.1 C15.2 C19.1 C21.1 C24.1 C27.1 C28.1 R15.2 U4.2 U5.4 U6.4 U7.5 U8.8 | length 1882.4
  Top Layer w25: U5.4 3130,3075 3145,3060 3227.71,3060 3229.32,3058.39 v2(3230.14,3058.39) ; U7.5 3319.69,3592.4 C24.1 3380.36,3587.6 3395,3572.95 3395,3379.64 3427.14,3347.5 v3(3635,3347.5) R15.2 ; U8.8 v2(3735,3025)
  GND w25: v2(3395,3465) 3395,3350 3440,3305 v2(3440,3205) ; v3(3635,3347.5) 3635,3125 v2(3735,3025)
  Bottom Layer w25: v2(3230.14,3058.39) 3230.71,3058.96 3252.82,3058.96 3268.86,3075 U6.4 ; U4.2 3315.3,3557.4 3394.43,3478.27 3394.43,3465.57 v2(3395,3465) ; C12.1 3439.43,3165.02 3439.43,3204.43 v2(3440,3205)
+3.3: C2.1 C5.2 C6.2 C7.2 C8.2 C9.2 C10.2 P2.1 P3.1 R1.2 R3.2 R6.2 R7.2 U1.5 U1.16 U2.5 U3.8 | length 3214.1
  Top Layer w15: C10.2 R6.2
  Top Layer w20: P3.1 2851.18,3511.18 C10.2 2911.18,3510 2945,3510 2980,3475 v2(2980,3415) ; R3.2 4193.47,3582.12 4193.47,3551.53 v2(4195,3550)
  Top Layer w25: v2(3740,3475) 3740.3,3474.7 3740.3,3425.3 R7.2 3920,3425 v2(3980,3485) U3.8 ; C7.2 4035.36,2799.64 4035.36,2764.64 4050,2750 4170,2750 v3(4195,2775) 4196.35,2775 4221.35,2800 P2.1
  POWER w25: v2(3980,3485) 4130,3485 v2(4195,3550) 4195,3240 ; v3(4035,3240) 4195,3240 ; v3(4195,2775) 4195,3240
  Bottom Layer w20: v2(2980,3415) 3680,3415 v2(3740,3475)
  Bottom Layer w25: v2(3980,3485) 3980.57,3484.43 3984.79,3484.43 4017.6,3451.61 U2.5 4017.6,3377.81 C2.1
+5: C1.1 C23.1 C33.2 C34.1 P1.1 U2.1 U2.3 U7.1 U7.3 | length 2398.7
  Top Layer w25: U7.3 3150,3490 3127.6,3467.6 C23.1 3071.99,3470.1 3054.9,3470.1 3010,3515 v4(3010,3695) 3014.78,3690.22 3033.05,3690.22 C34.1 3126.22,3648.78 3150,3625 U7.1
  POWER w50: v4(3010,3695) 3028.94,3713.94 v4(3966.06,3713.94) 3967.13,3715 P1.1
  Bottom Layer w25: v4(3966.06,3713.94) 3966.06,3608.17 C1.1 3967.13,3562.87 3990,3540 4017.3,3540 4017.6,3539.7 U2.1 ; U2.3 4092.4,3539.7 4092.7,3540 4130,3540 4153.31,3563.31 C33.2 4192.1,3607.1 P1.1
-2.5-A: C11.1 C13.1 C16.2 C20.1 C22.1 C30.1 C31.1 U4.1 U5.11 U6.11 U8.4 | length 1184.3
  Top Layer w25: v2(3185,3091.5) 3258.5,3091.5 3275,3075 U5.11@3295,3075 ; C11.1 3448.71,3173.5 3480,3173.5 ; v2(3477.49,3137.95) 3478.06,3138.52 3478.06,3171.56 3480,3173.5 ; U8.4 3585,3174.19 3584.31,3173.5 3480,3173.5
  GND w25: v2(3275,3635) 3275,3320 3456.48,3138.52 3476.92,3138.52 v2(3477.49,3137.95)
  Bottom Layer w25: U6.11 3110.69,3075.69 3168.38,3075.69 3184.19,3091.5 v2(3185,3091.5) ; U4.1@3235.89,3600 3235.89,3634.25 ; C16.2 3235.89,3634.25 ; v2(3275,3635) 3274.43,3634.43 3236.06,3634.43 3235.89,3634.25
ADC0: R11.2 U1.11 U5.1 | length 1119.3
  Top Layer w15: R11.2 3017.8,3227.8 3098.35,3227.8 U5.1 3104.47,3228.33 3127.84,3228.33 3136.63,3237.11 v2(3136.63,3270) ; U1.11 3894.92,2930.43 3894.92,2999.92 v2(3895,3000)
  POWER w15: v2(3136.63,3270) 3320,3270 3355,3235 3690,3235 3895,3030 v2(3895,3000)
ADC1: R14.2 U1.12 U5.7 | length 1151.2
  Top Layer w15: v2(3015,2860) R14.2 ; R14.2@3017.54,2916.14 3026.39,2925 U5.7 ; v2(3915,2855) 3915,2858.52 3920.43,2863.95 U1.12
  POWER w15: v2(3015,2860) 3050,2825 3885,2825 v2(3915,2855)
ADC2: R24.1 U1.13 U8.7 | length 568.1
  Top Layer w15: U8.7 3687.8,2960.91 3687.8,2891.5 R24.1 3690.59,2794.41 3705,2780 3920,2780 3946.02,2806.02 U1.13
ADC3: R26.2 U1.14 U5.14 | length 895.2
  Top Layer w15: U5.14 3308.13,3225.3 3374.7,3225.3 R26.2@3375,3225.59 ; R26.2 v2(3375,3280) ; v2(3970,2995) 3971,2994 3971,2930.96 U1.14
  POWER w15: v2(3375,3280) 3685,3280 v2(3970,2995)
AGND: C11.2 C12.2 C13.2 C14.2 C15.1 C16.1 C18.1 C19.2 C20.2 C21.2 C22.2 C23.2 C24.2 C25.1 C26.2 C27.2 C28.2 C29.1 C30.2 C31.2 C32.1 C34.2 P4.5 R10.1 R13.1 R17.1 R19.1 R21.2 R25.1 R27.2 U4.4 U7.2
  other v1: 2800,2800 2850,2800 2900,2800 2950,2800 3000,2800 3050,2800 3200,2800 3350,2800 3400,2800 3450,2800 3500,2800 3600,2800 2875,2850 2925,2850 2975,2850 3375,2850 3425,2850 3475,2850 3525,2850 2800,2900 2850,2900 2900,2900 2950,2900 3050,2900 2875,2950 2925,2950 2975,2950 3025,2950 3425,2950 3475,2950 3525,2950 3775,2950 3825,2950 2800,3000 2850,3000 3450,3000 3500,3000 3550,3000 3800,3000 2875,3050 3475,3050 3625,3050 3775,3050 3825,3050 2800,3100 3700,3100 3750,3100 2875,3150 3350,3200 2800,3300 2850,3300 2900,3300 2950,3300 3000,3300 3050,3300 3350,3300 2975,3350 3025,3350 3075,3350 3325,3350 3675,3350 3775,3350
CLK: P2.3 U1.20 | length 203.7
  Top Layer w6: U1.20 4230.35,2930.35 P2.3
DIO: P2.2 U1.19 | length 232.2
  Top Layer w6: U1.19 4099.57,2907.72 4114.46,2892.83 4292.83,2892.83 P2.2
DQ: P3.2 R6.1 U1.17 | length 1688.3
  Top Layer w6: R6.1 R6.1@2911.18,3630
  Top Layer w15: P3.2 2815,3580 2866.18,3631.18 R6.1 ; R6.1@2911.18,3630 v2(2965,3630) ; v2(4015,2995) 4047.46,2962.54 4047.46,2931.28 U1.17
  POWER w15: v2(2965,3630) 2965,3500 3045,3420 3335,3420 3380,3375 3710,3375 3745,3340 3745,3265 v2(4015,2995)
ELE_0: P4.1 U6.3 | length 521.6
  POWER w15: P4.1 3045,3240 3160,3125 v2(3205,3125)
  Bottom Layer w15: v2(3205,3125) U6.3
ELE_1: P4.2 U6.5 | length 579.6
  POWER w15: P4.2 2895,3210 3015,3210 v2(3200,3025)
  Bottom Layer w15: v2(3200,3025) U6.5
ELE_2: P4.4 U6.10 | length 320.2
  Bottom Layer w15: P4.4 2885,3000 3053.5,3000 3075.69,3022.18 3107.18,3022.18 U6.10
ELE_3: P4.3 U6.12 | length 341.4
  Bottom Layer w15: P4.3 2825,3051.92 2839.29,3066.21 2839.29,3069.29 2910,3140 3061.17,3140 3076.17,3125 U6.12
GND: C1.2 C2.2 C3.1 C4.2 C5.1 C6.1 C7.1 C8.1 C9.1 C10.1 C33.1 D1.K D2.K P1.4 P2.4 P3.3 R2.2 R5.1 R27.1 SW1.1 U1.15 U2.2 U3.5
  other v1: 2750,2750 3900,2750 3950,2750 4000,2750 4250,2750 4300,2750 4350,2750 3975,2800 4375,2800 4150,2850 4250,2850 4300,2850 4350,2850 4375,2900 4150,2950 4300,2950 4350,2950 3925,3000 4125,3000 4225,3000 4375,3000 4050,3050 4100,3050 4150,3050 4250,3050 4300,3050 4350,3050 4125,3100 4225,3100 4375,3100 4150,3150 4250,3150 4300,3150 4350,3150 4225,3200 4275,3200 4325,3200 4375,3200 3900,3250 4250,3250 4300,3250 4350,3250 4225,3300 4275,3300 4325,3300 4375,3300 2750,3350 3900,3350 4250,3350 4300,3350 4350,3350 2775,3400 2825,3400 2875,3400 2925,3400 4225,3400 4375,3400 2750,3450 3450,3450 3600,3450 3650,3450 4050,3450 4150,3450 4250,3450 4350,3450 3625,3500 3675,3500 3775,3500 4375,3500 2750,3550 3450,3550 4350,3550 2775,3600 2875,3600 3475,3600 3525,3600 3575,3600 3625,3600 3675,3600 3725,3600 4225,3600 4375,3600 2750,3650 4350,3650 3995,3665 2775,3700 2875,3700 2925,3700 4375,3700 2750,3750 2800,3750 2850,3750 2900,3750 2950,3750 4350,3750 3350,3755 3400,3755 3450,3755 3500,3755 3550,3755 3600,3755 3650,3755 3700,3755 3750,3755 3800,3755 3850,3755 3900,3755 3950,3755 4000,3755 4050,3755 4100,3755 4150,3755
LED: R8.2 U1.18 | length 779.6
  Top Layer w6: v2(4065,2985) 4065,2979.05 4073.98,2970.07 U1.18
  Top Layer w15: R8.2 v2(3795,3540)
  POWER w15: v2(3795,3540) 3820,3515 3820,3230 v2(4065,2985)
NetC4_1: C4.1 U2.4 | length 75.8
  Bottom Layer w25: C4.1 4092.26,3367.24 4092.26,3442.62 U2.4
NetC17_1: C17.1 U4.3 | length 261.1
  Bottom Layer w25: C17.1 3068.39,3524.31 3068.39,3496.61 3100,3465 3225,3465 3242.24,3482.24 U4.3@3242.24,3517.98
NetC17_2: C17.2 U4.5
NetC26_1: C26.1 U7.4 | length 84.6
  Top Layer w25: U7.4 3256.3,3517.6 3267.48,3528.78 C26.1
NetD1_A: D1.A R7.1 | length 121.4
  Top Layer w15: D1.A 3565.08,3425 R7.1
NetD2_A: D2.A R8.1 | length 121.4
  Top Layer w15: D2.A 3565.08,3540 R8.1
NetR2_1: R2.1 U1.1 | length 69.2
  Top Layer w6: R2.1 4125.16,3219.84 U1.1
NetR9_1: R9.1 U6.1 U6.2 | length 142.6
  Bottom Layer w15: R9.1 3294.41,3228.98 3293.9,3228.98 3298.98,3223.9 U6.2
NetR10_2: R10.2 R11.1 U5.2 | length 267.8
  Top Layer w15: R11.1@3017.54,3171.73 3019.17,3173.37 3099.51,3173.37 U5.2 3102.27,3176.13 3136.13,3176.13 3163.13,3203.13 R10.2
NetR12_1: R12.1 U6.6 U6.7 | length 120.4
  Bottom Layer w15: U6.6 U6.7 3300,2923.98 R12.1
NetR13_2: R13.2 R14.1 U5.6 | length 253.4
  Top Layer w15: R14.1@3017.54,2977.32 3018.7,2976.16 3099.98,2976.16 U5.6 3145,2975 3162.54,2957.46 R13.2
NetR15_1: R15.1 R17.2 U8.3 | length 131.8
  Top Layer w15: U8.3 R15.1 R17.2
NetR16_1: R16.1 U6.8 U6.9 | length 127.7
  Bottom Layer w15: R16.1 3100,2921.02 3103.98,2925 U6.8 U6.9
NetR18_1: R18.1 R23.1 U8.5 | length 225
  Top Layer w15: R18.1 3518.11,3040 3575,3040 3585,3030 U8.5 3585,2908.7 R23.1
NetR18_2: R18.2 U8.1 U8.2 | length 276.9
  Top Layer w15: R18.2 3659.29,3104.29 3685,3130 U8.2 U8.1
NetR19_2: R19.2 R20.1 U5.9 | length 252.1
  Top Layer w15: R19.2 3236.94,2961.94 3250,2975 3374.03,2975 R20.1
NetR20_2: R20.2 R23.2 U5.8 | length 211
  Top Layer w15: U5.8 3369.86,2925 R20.2 3417.68,2917.32 3445,2890 3502.52,2890 R23.2
NetR21_1: R21.1 R24.2 U8.6 | length 138.9
  Top Layer w15: R21.1 3627.5,2830.61 3627.5,2886.79 R24.2 3635,2894.29 U8.6
NetR22_1: R22.1 U6.13 U6.14 | length 143.3
  Bottom Layer w15: R22.1 3104.41,3228.98 3108.39,3225 U6.14 U6.13
NetR25_2: R25.2 R26.1 U5.13 | length 265.5
  Top Layer w15: R25.2 3232.54,3197.46 3255,3175 U5.13 3309.47,3173.37 3370.9,3173.37 R26.1@3372.54,3171.73
PA: C18.2 R9.2 U5.12 | length 324.3
  Top Layer w15: v2(3230,3155) 3260,3125 U5.12
  Bottom Layer w15: v2(3230,3155) 3230,3155.29 3215,3170.29 3215,3296.77 R9.2 3233.52,3315.3 3233.52,3374.7 C18.2
PB: C25.2 R12.2 U5.10 | length 302.2
  Top Layer w15: v2(3220,2985) 3260,3025 U5.10
  Bottom Layer w15: v2(3220,2985) 3220,2873.82 R12.2 C25.2
PC: C29.2 R16.2 U5.5 | length 293.2
  Top Layer w15: U5.5 3140,3025 v2(3180,2985)
  Bottom Layer w15: C29.2 R16.2 3180,2873.82 v2(3180,2985)
PD: C32.2 R22.2 U5.3 | length 325.5
  Top Layer w15: U5.3 3150,3125 v2(3180,3155)
  Bottom Layer w15: C32.2 R22.2 3190,3290.59 3190,3168.52 3180,3158.52 v2(3180,3155)
RS485_A: P1.2 R3.1 R4.2 U3.6 | length 442.1
  Top Layer w10: R4.2 4090.59,3626.18 R3.1 4089.41,3594.62 4082.61,3587.82 4082.61,3550.95 U3.6 4080,3535.55 4110.55,3505 4190,3505 P1.2
RS485_B: P1.3 R4.1 R5.2 U3.7 | length 470.4
  Top Layer w10: R4.1 4025.59,3691.18 R5.2 4030,3620.59 U3.7 4030,3535.55 4085.55,3480 4265,3480 P1.3
RS485_RE: U1.7 U3.2 U3.3 | length 272.4
  Top Layer w6: U1.7 3971.61,3289.11 4009.19,3326.68 4021.86,3326.68 4030,3334.82 U3.2 U3.3
RS485_RX: U1.9 U3.4 | length 508.1
  Top Layer w6: U1.9 3920.43,3380.43 3950,3410 4110,3410 4130,3390 U3.4
RS485_TX: U1.8 U3.1 | length 204.9
  Top Layer w6: U1.8 3946.02,3294.88 3980,3328.86 U3.1
RST: C3.2 R1.1 SW1.2 U1.4 | length 939.7
  Top Layer w15: v2(3775,3620) 3775,3655 SW1.2 3766.18,3686.18 C3.2 R1.1 ; U1.4 4049,3150.22 4049,3096 v2(4050,3095)
  POWER w15: v2(3775,3620) 3860,3535 3860,3240 4005,3095 v2(4050,3095)
pads on no net: U1.2 U1.3 U1.6 U1.10

## Polygon pours and split planes (outlines as drawn)
GND on Top Layer "GND_L01_P011" (solid, pour order 11): 2715,2765 2715,3745 cw(c2760,3745) 2760,3790 4340,3790 cw(c4340,3740) 4390,3740 4390,2765 cw(c4340,2765) 4340,2715 2765,2715 cw(c2765,2765)
AGND on Top Layer "AGND_L01_P009" (solid, pour order 9): 3845,3360 3820,3385 3425,3385 3425,3610 3300,3735 2970,3735 2945,3710 2945,3360 2815,3360 2755,3295 2755,3290 2755,2785 2785,2755 3830,2755 3845,2755 3845,2810
+3.3 on Top Layer "+3.3_L01_P008" (solid, pour order 8): 3875,3645 3875,3535 3995,3535 3995,3645
+3.3 on Top Layer "+3.3_L01_P007" (solid, pour order 7): 3985,3240 3985,3200 4000,3200 4010,3186.67 4010,3120 4035,3120 4035,3185 4050,3200 4085,3200 4085,3240
+3.3 on Top Layer "+3.3_L01_P006" (solid, pour order 6): 4015,2965 4015,2780 4060,2780 4060,2875 4035,2900 4035,2965
-2.5-A on Top Layer "-2.5-A_L01_P003" (solid, pour order 3): 3275,3060 3330,3060 3340,3050 3360,3025 3395,3025 3395,3120 3360,3120 3330,3090 3275,3090
+2.5-A on Top Layer "+2.5-A_L01_P002" (solid, pour order 2): 2990,3120 3030,3120 3060,3090 3130,3090 3130,3060 3060,3060 3025,3025 2990,3025
+2.5-A on Top Layer "+2.5-A_L01_P001" (solid, pour order 1): 3720,2995 3720,2810 3730,2800 3765,2800 3775,2810 3775,2915 3750,2940 3750,2995
-2.5-A on Top Layer "-2.5-A_L01_P000" (solid, pour order 0): 3600,3140 3600,3320 3590,3330 3560,3330 3555,3325 3555,3220 3570,3205 3570,3140
GND on Bottom Layer "GND_L04_P014" (solid, pour order 14): 2715,2765 2715,3745 cw(c2760,3745) 2760,3790 4340,3790 cw(c4340,3740) 4390,3740 4390,2765 cw(c4340,2765) 4340,2715 2765,2715 cw(c2765,2765)
AGND on Bottom Layer "AGND_L04_P010" (solid, pour order 10): 3845,3360 3820,3385 3425,3385 3425,3610 3300,3735 2970,3735 2945,3710 2945,3360 2815,3360 2755,3295 2755,3290 2755,2785 2785,2755 3830,2755 3845,2755 3845,2810
+2.5-A on Bottom Layer "+2.5-A_L04_P005" (solid, pour order 5): 3250,3090 3250,3060 3335,3060 3360,3020 3410,3020 3410,3125 3355,3125 3330,3090
-2.5-A on Bottom Layer "-2.5-A_L04_P004" (solid, pour order 4): 2985,3125 2985,3025 3030,3025 3065,3060 3155,3060 3155,3090 3055,3090 3020,3125
GND on GND "GND_L02_P018" (solid, pour order 18): 2715,2765 2715,3745 cw(c2760,3745) 2760,3790 4340,3790 cw(c4340,3740) 4390,3740 4390,2765 cw(c4340,2765) 4340,2715 2765,2715 cw(c2765,2765)
AGND on GND "AGND_L02_P016" (solid, pour order 16): 3845,3360 3820,3385 3425,3385 3425,3610 3300,3735 2970,3735 2945,3710 2945,3360 2815,3360 2755,3295 2755,3290 2755,2785 2785,2755 3830,2755 3845,2755 3845,2810
GND on POWER "GND_L03_P019" (solid, pour order 19): 2715,2765 2715,3745 cw(c2760,3745) 2760,3790 4340,3790 cw(c4340,3740) 4390,3740 4390,2765 cw(c4340,2765) 4340,2715 2765,2715 cw(c2765,2765)
AGND on POWER "AGND_L03_P017" (solid, pour order 17): 3845,3360 3820,3385 3425,3385 3425,3610 3300,3735 2970,3735 2945,3710 2945,3360 2815,3360 2755,3295 2755,3290 2755,2785 2785,2755 3830,2755 3845,2755 3845,2810

## Other copper
Bottom Layer:
  rectangle net NetC17_2: 3050,3565 3185,3605

## Silkscreen, mask and mechanical layers (free items; w line width, h text height)
Top Overlay:
  text "GND" at 2765,3735 h40
  text "+5" at 4175,3695 h40
  text "A" at 4210,3600 h40
  text "DQ" at 2955,3560 h40
  text "B" at 4210,3500 h40
  text "3.3" at 2760,3375 h40
  text "GND" at 4245,3310 h40
  text "PH" at 2890,3220 h40
  text "C" at 2885,3120 h40
  text "GND" at 4135,3095 h40
  text "B" at 2885,3025 h40
  text "CLK" at 4135,2980 h40
  text "A" at 2890,2920 h40
  text "DIO" at 4140,2880 h40
  text "REF" at 2890,2815 h40
  text "3.3" at 4140,2775 h40
Mechanical 1:
  the board outline again, w10